# Altium PCB 14.07.2020.PcbDoc
Units mm, origin at the board's own origin, x right, y up, seen from the top; angles counter-clockwise.
Board outline 100 x 100 mm, 2 copper layers (Top Layer, Bottom Layer); 30 components, 26 nets, 83 pads, 0 vias.
Unrouted connection lines stored in the file: 57.
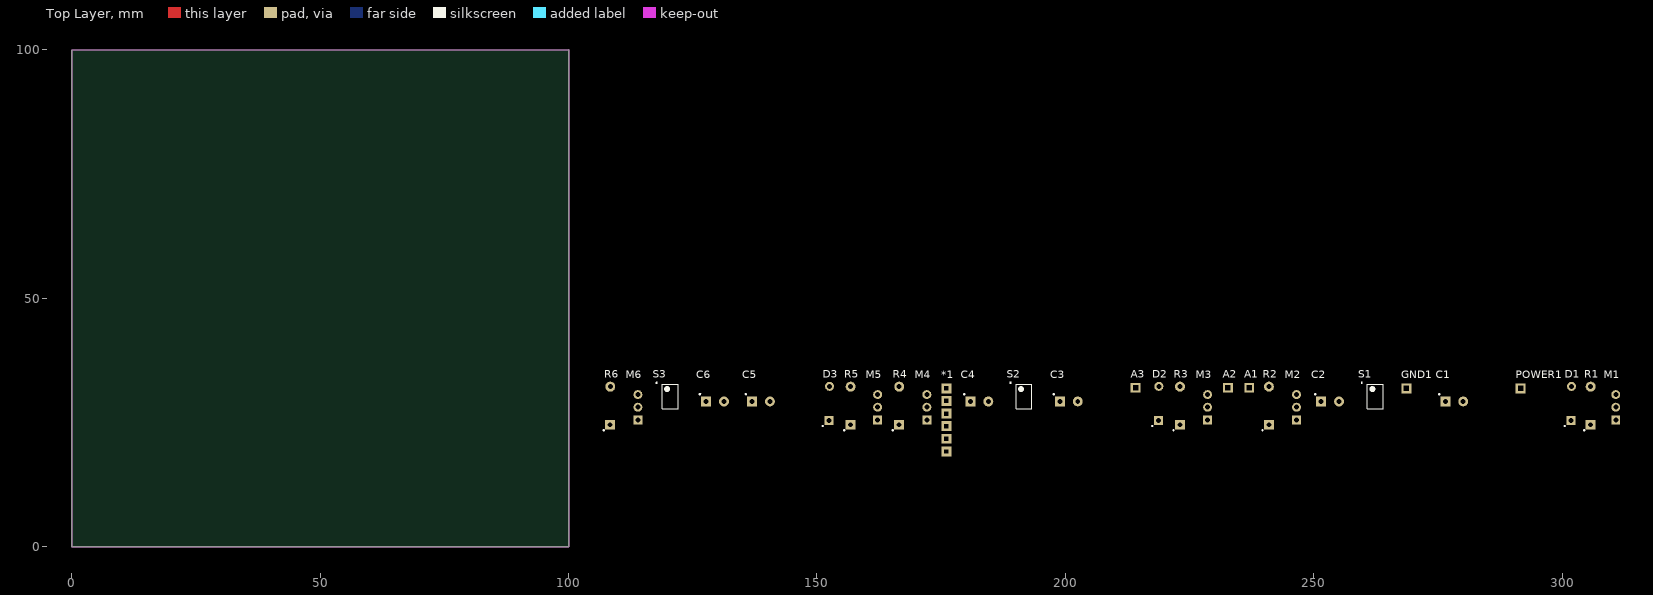
[diagram p0: Top Layer view]
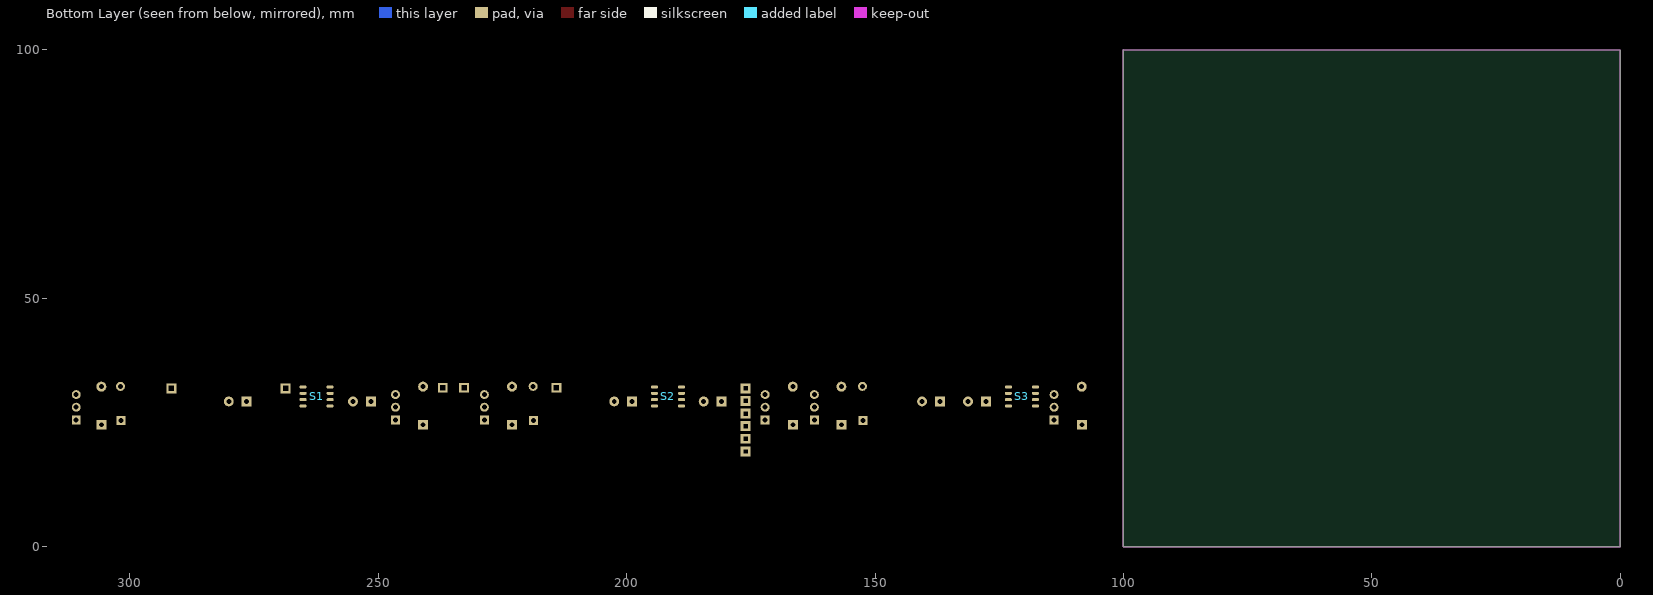
[diagram p1: Bottom Layer view, seen from below]

## Layer stack, top to bottom
Top Solder: solder mask 0.0102, Solder Resist, Dk 3.5
Top Layer: signal copper 0.0356
Dielectric 1: dielectric 0.32, FR-4, Dk 4.8
Bottom Layer: signal copper 0.0356
Bottom Solder: solder mask 0.0102, Solder Resist, Dk 3.5

## Board outline
0,0 0,99.949 100,100 100,0

## Design rules (kind name [scope] priority, off if disabled: settings)
Clearance [All] p1: gap=0.254 ignorepadtopadclearanceinfootprint=FALSE except(0: Arc-Hole Track-Hole SMDPad-Hole THPad-Hole Via-Hole Fill-Hole Poly-Hole Region-Hole Text-Hole)
PolygonConnect [All] p1: connectstyle=Relief reliefconductorwidth=0.254 reliefentries=4 polygonreliefangle="90 Angle" airgapwidth=0.254
RoomDefinition Sheet1 [InComponentClass('Sheet1')] p1: confinementstyle=ConfineIn formatcopy=TRUE lockcomponents=FALSE outline 106.731,3.658 312.471,3.658 312.471,35.916 106.731,35.916
RoutingVias [All] p1: holewidth=0.711 width=1.27 viastyle="Through Hole" minholewidth=0.711 minwidth=1.27 maxholewidth=0.711 maxwidth=1.27
SolderMaskExpansion [All] p1: expansion=0.102 istentingtop=FALSE
Width [All] p1: maxlimit=0.254 minlimit=0.254 preferedwidth=0.254
30 further rules are at their usual default settings.

## Components (designator, comment, footprint, x,y, rotation, side; value= is the part's Value field where it differs from the comment)
*1 "6pinheader" 6pinheader 176.073,19.152 r90 top
A1 "" 1pinheader 237.033,31.979 r0 top
A2 "" 1pinheader 232.715,31.979 r0 top
A3 "" 1pinheader 214.173,31.979 r0 top
C1 "2.2uF25v capacitor" "2.2uf25v capacitor" 276.53,29.185 r0 top
C2 "10uF25v capacitor" "10uf25V capacitor" 251.511,29.185 r0 top
C3 "2.2uF25v capacitor" "2.2uf25v capacitor" 198.933,29.185 r0 top
C4 "10uF25v capacitor" "10uf25V capacitor" 180.899,29.185 r0 top
C5 "2.2uF25v capacitor" "2.2uf25v capacitor" 136.957,29.185 r0 top
C6 "10uF25v capacitor" "10uf25V capacitor" 127.686,29.185 r0 top
D1 "1N4148 diyot" "1N4148 diyot" 301.803,25.375 r90 top
D2 "1N4148 diyot" "1N4148 diyot" 218.745,25.375 r90 top
D3 "1N4148 diyot" "1N4148 diyot" 152.451,25.375 r90 top
GND1 "" 1pinheader 268.656,31.852 r90 top
M1 "IRFZ46N mosfet" "IRFZ46N mosfet" 310.82,25.502 r90 top
M2 "IRFZ46N mosfet" "IRFZ46N mosfet" 246.558,25.502 r90 top
M3 "IRFZ46N mosfet" "IRFZ46N mosfet" 228.651,25.502 r90 top
M4 "IRFZ46N mosfet" "IRFZ46N mosfet" 172.136,25.502 r90 top
M5 "IRFZ46N mosfet" "IRFZ46N mosfet" 162.23,25.502 r90 top
M6 "IRFZ46N mosfet" "IRFZ46N mosfet" 113.97,25.502 r90 top
POWER1 "" 1pinheader 291.643,31.852 r90 top
R1 "100 resistor" "100 resistor" 305.74,24.486 r90 top
R2 "100 resistor" "100 resistor" 240.97,24.486 r90 top
R3 "100 resistor" "100 resistor" 223.063,24.486 r90 top
R4 "100 resistor" "100 resistor" 166.548,24.486 r90 top
R5 "100 resistor" "100 resistor" 156.769,24.486 r90 top
R6 "100 resistor" "100 resistor" 108.382,24.486 r90 top
S1 "IR2104" "IR2104 mos sürücü" 262.433,30.201 r0 top
S2 "IR2104" "IR2104 mos sürücü" 191.694,30.201 r0 top
S3 "IR2104" "IR2104 mos sürücü" 120.447,30.201 r0 top

## Footprints (in the part's own frame and the unit in brackets; to place one, negate y for a bottom-side part, rotate by r counter-clockwise, add the part's x,y. Pads: shape width x height; smd on the part's side, far side on the other; paste and mask are expansions set on the pad)
"1N4148 diyot" [mm]
  rect 1.8x1.8 hole 1 mask+0.05: 1(0,0)
  round 1.8 hole 1 mask+0.05: 2(6.858,-0.102)
  silkscreen extent -1.21,1.18 -1.03,1.36, body extent -0.22,-1.15 7.28,0.85, height 2
1pinheader [mm]
  rect 2x2 hole 1 square: 1(0,-0.025)
  body extent -1.27,-1.27 1.27,1.22, height 8.64
"2.2uf25v capacitor" [mm]
  rect 2x2 hole 1 paste+0 mask+0.05: 1(-0.025,0.025)
  round 2 hole 1 paste+0 mask+0.05: 2(3.581,0.025)
  silkscreen extent -1.36,1.39 -1.13,1.61, body extent -2.25,-4.08 5.8,3.97, height 12.53
6pinheader [mm]
  rect 2x2 hole 0.8 square: 2(-0.025,0) 3(2.54,0) 4(5.08,0) 5(7.62,0) 6(10.16,0) 7(12.7,0)
  body extent -1.27,-1.24 13.97,1.25, height 8.54
"10uf25V capacitor" [mm]
  rect 2x2 hole 1 paste+0 mask+0.05: 1(0,0)
  round 2 hole 1 paste+0 mask+0.05: 2(3.607,0)
  silkscreen extent -1.33,1.36 -1.11,1.59, body extent -2.22,-4.1 5.83,3.95, height 12.53
"100 resistor" [mm]
  rect 2x2 hole 1 mask+0.05: 1(0.025,0)
  round 2 hole 1 mask+0.05: 2(7.696,-0.025)
  silkscreen extent -1.18,1.18 -1,1.36, body extent -0.16,-1.08 7.94,0.92, height 2
"IR2104 mos sürücü" [mm] "SOIC, 8-Leads, Body 4,90x3,90mm, Pitch 1,27mm, IPC Medium Density"
  oval 1.45x0.6 smd far side: 1(-2.725,1.905) 2(-2.725,0.635) 3(-2.725,-0.635) 4(-2.725,-1.905) 5(2.725,-1.905) 6(2.725,-0.635) 7(2.725,0.635) 8(2.725,1.905)
  silkscreen extent -2.85,-2.5 1.6,2.88, body extent -3,-2.5 3,2.5, height 1.35
"IRFZ46N mosfet" [mm]
  rect 1.8x1.8 hole 1: 1(0,0)
  round 1.8 hole 1: 2(2.54,0) 3(5.08,0)
  body extent -2.54,-1.52 7.62,2.68, height 25.36

## Part data
A1 A2 A3 GND1 POWER1: library part "1 pin header"

## Nets (pads, with @x,y where several pads share a name; then routed paths per layer and width w, separated by ;. In a path a pad name is that pad's centre, name@x,y a point inside that pad or via, vN(x,y) a via of type N, cw(c..) or ccw(c..) an arc to the next point about the centre after c; other vN are vias at no path point)
+12: C2.1 C4.1 C6.1 D1.1 D2.1 D3.1 M1.2 M3.2 M5.2 POWER1.1 S1.1 S2.1 S3.1
GND: C2.2 C4.2 C6.2 GND1.1 M2.3 M4.3 M6.3 S1.4 S2.4 S3.4
Net*1_2: *1.2 S3.3
Net*1_3: *1.3 S3.2
Net*1_4: *1.4 S2.3
Net*1_5: *1.5 S2.2
Net*1_6: *1.6 S1.3
Net*1_7: *1.7 S1.2
NetA1_1: A1.1 C1.2 M1.3 M2.2 S1.6
NetA2_1: A2.1 C3.2 M3.3 M4.2 S2.6
NetA3_1: A3.1 C5.2 M5.3 M6.2 S3.6
NetC1_1: C1.1 D1.2 S1.8
NetC3_1: C3.1 D2.2 S2.8
NetC5_1: C5.1 D3.2 S3.8
NetM1_1: M1.1 R1.2
NetM2_1: M2.1 R2.2
NetM3_1: M3.1 R3.2
NetM4_1: M4.1 R4.2
NetM5_1: M5.1 R5.2
NetM6_1: M6.1 R6.2
NetR1_1: R1.1 S1.7
NetR2_1: R2.1 S1.5
NetR3_1: R3.1 S2.7
NetR4_1: R4.1 S2.5
NetR5_1: R5.1 S3.7
NetR6_1: R6.1 S3.5

## Keep-outs
Keep-Out Layer:
  the board outline again, w0.254

## Text inside footprints (layer, text, board x,y; h text height)
C1: Mechanical 1 "5 x 11 x 5mm" at 280.746,3.861 h1.52
C3: Mechanical 1 "5 x 11 x 5mm" at 203.149,3.861 h1.52
C5: Mechanical 1 "5 x 11 x 5mm" at 141.173,3.861 h1.52